# Altium PCB LM_001_Rev_F.PcbDoc (part 1 of 2)
Units mm, origin at the board's own origin, x right, y up, seen from the top; angles counter-clockwise.
Board outline 67 x 121.83 mm, 4 copper layers (Top Layer, +5V, Signal Layer 1, Bottom Layer), stack 0.778 mm thick; 108 components, 99 nets, 342 pads, 23 vias.
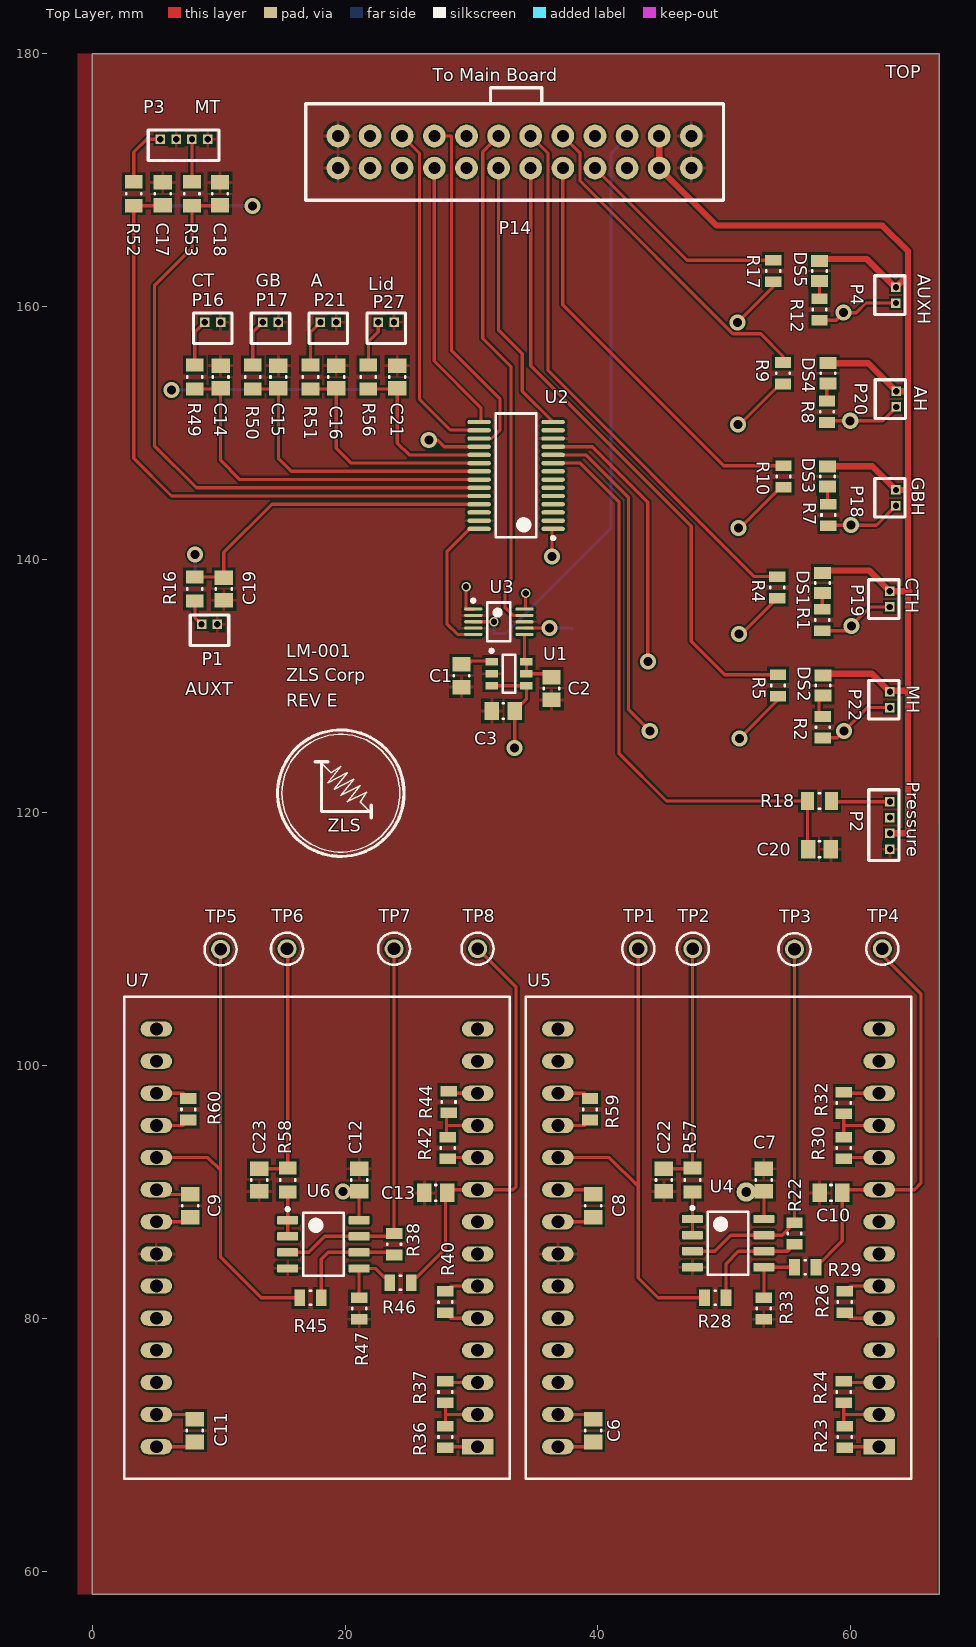
[diagram p0: Top Layer view]
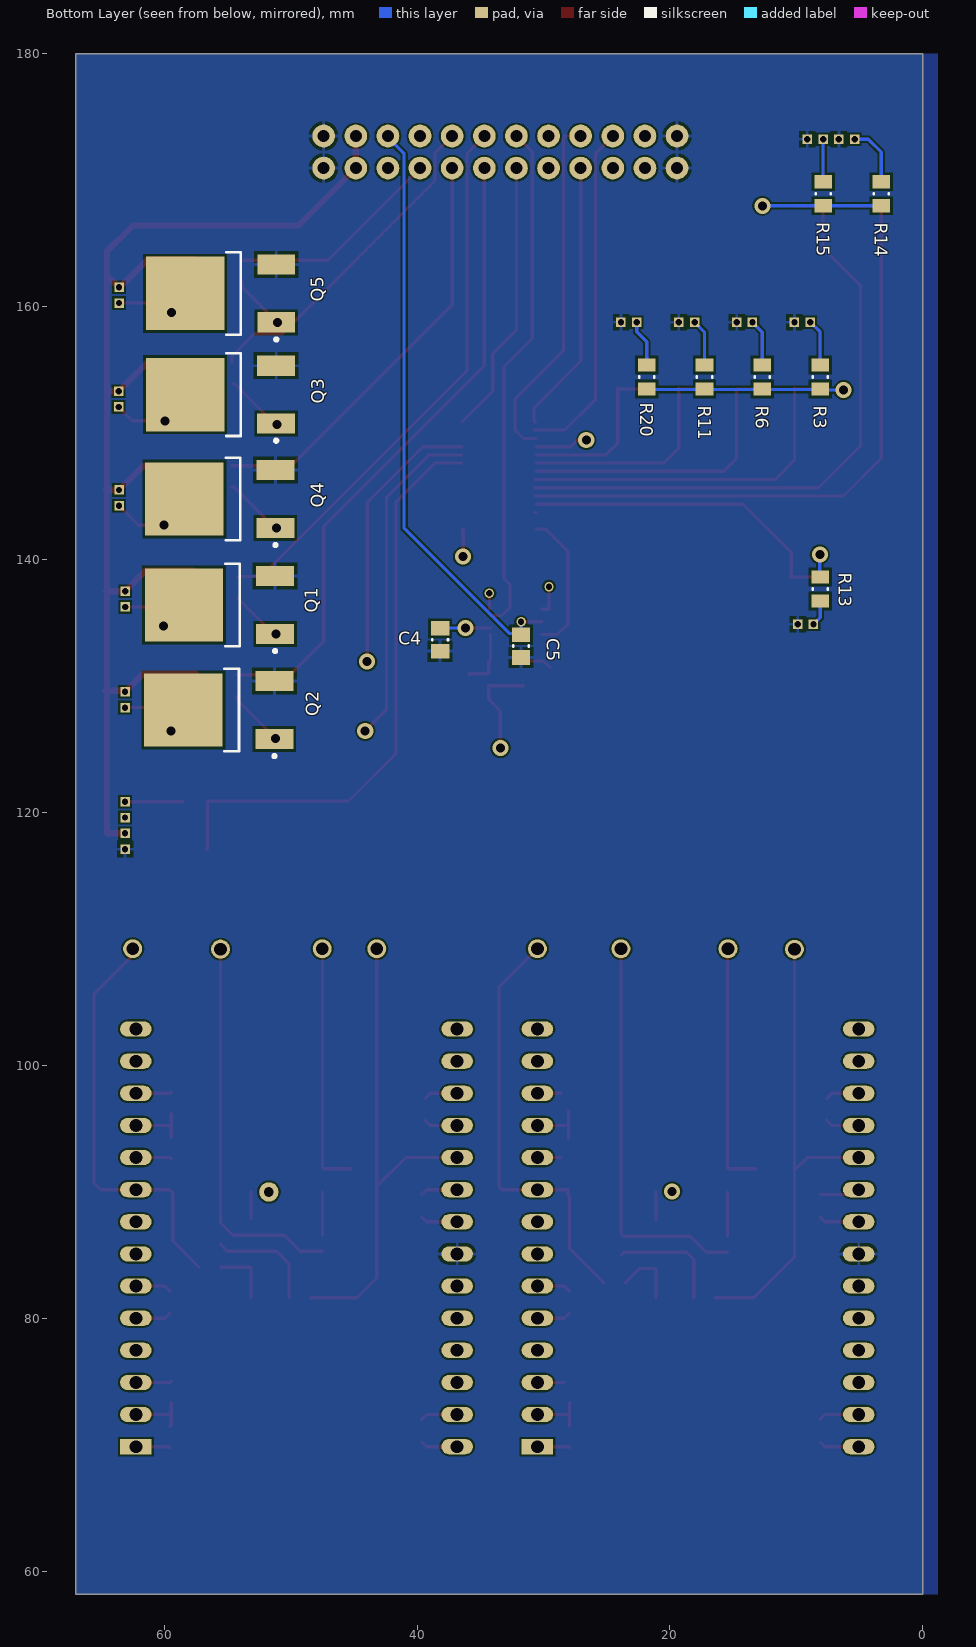
[diagram p1: Bottom Layer view, seen from below]
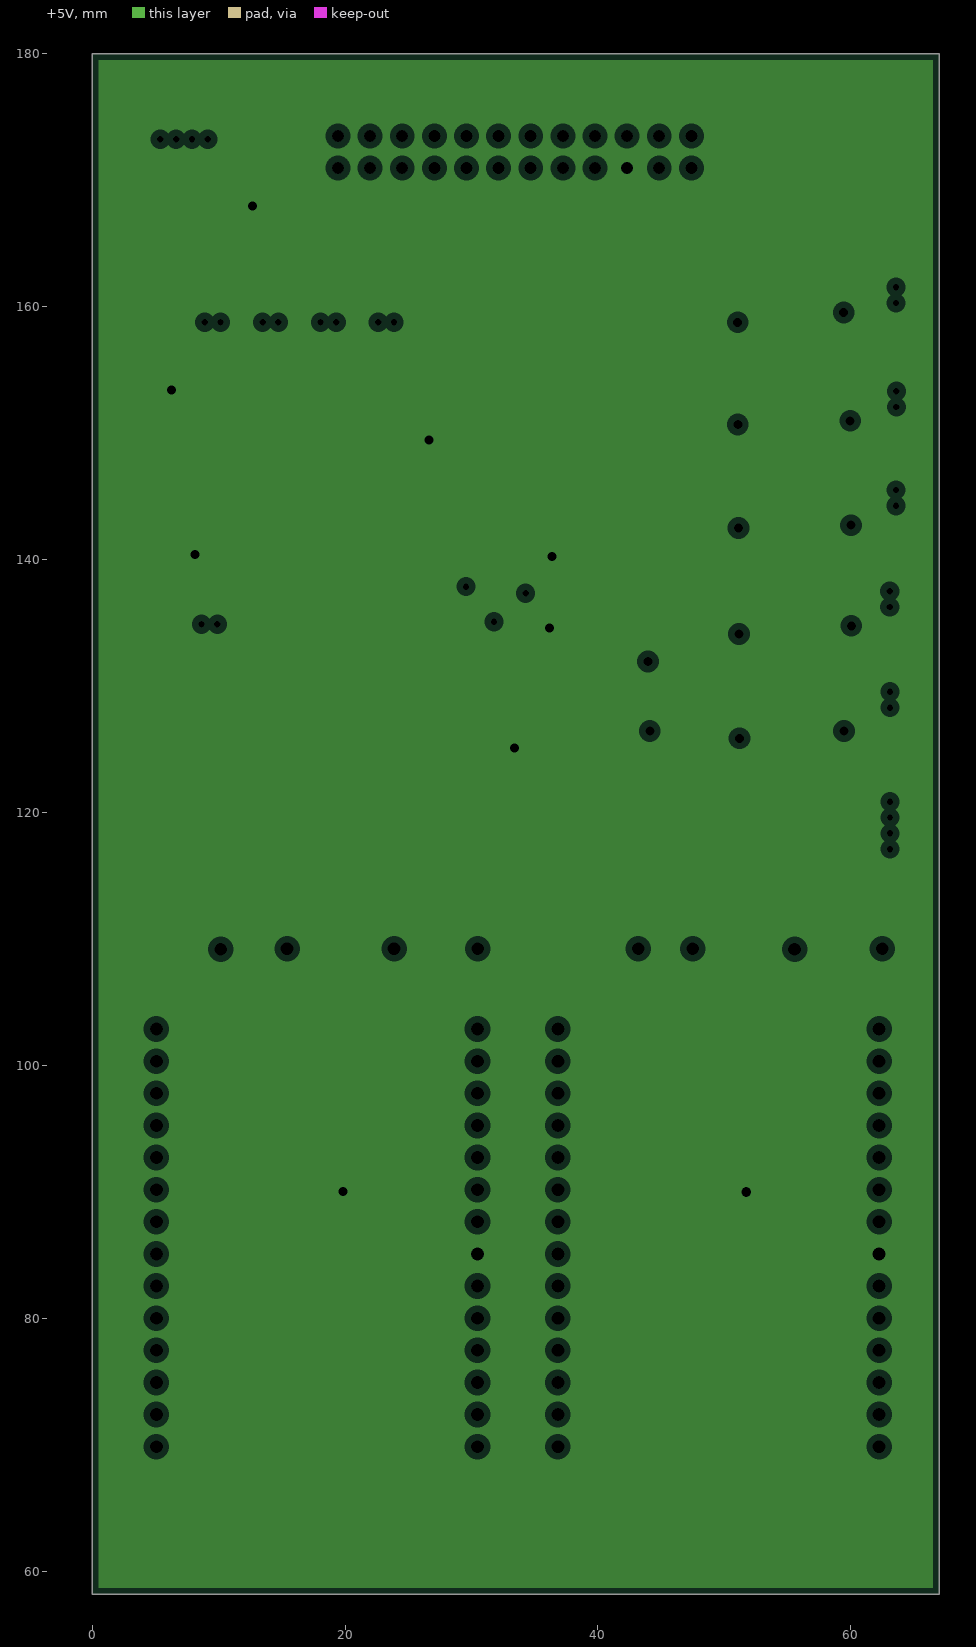
[diagram p2: +5V, clearances drawn from the general rule]
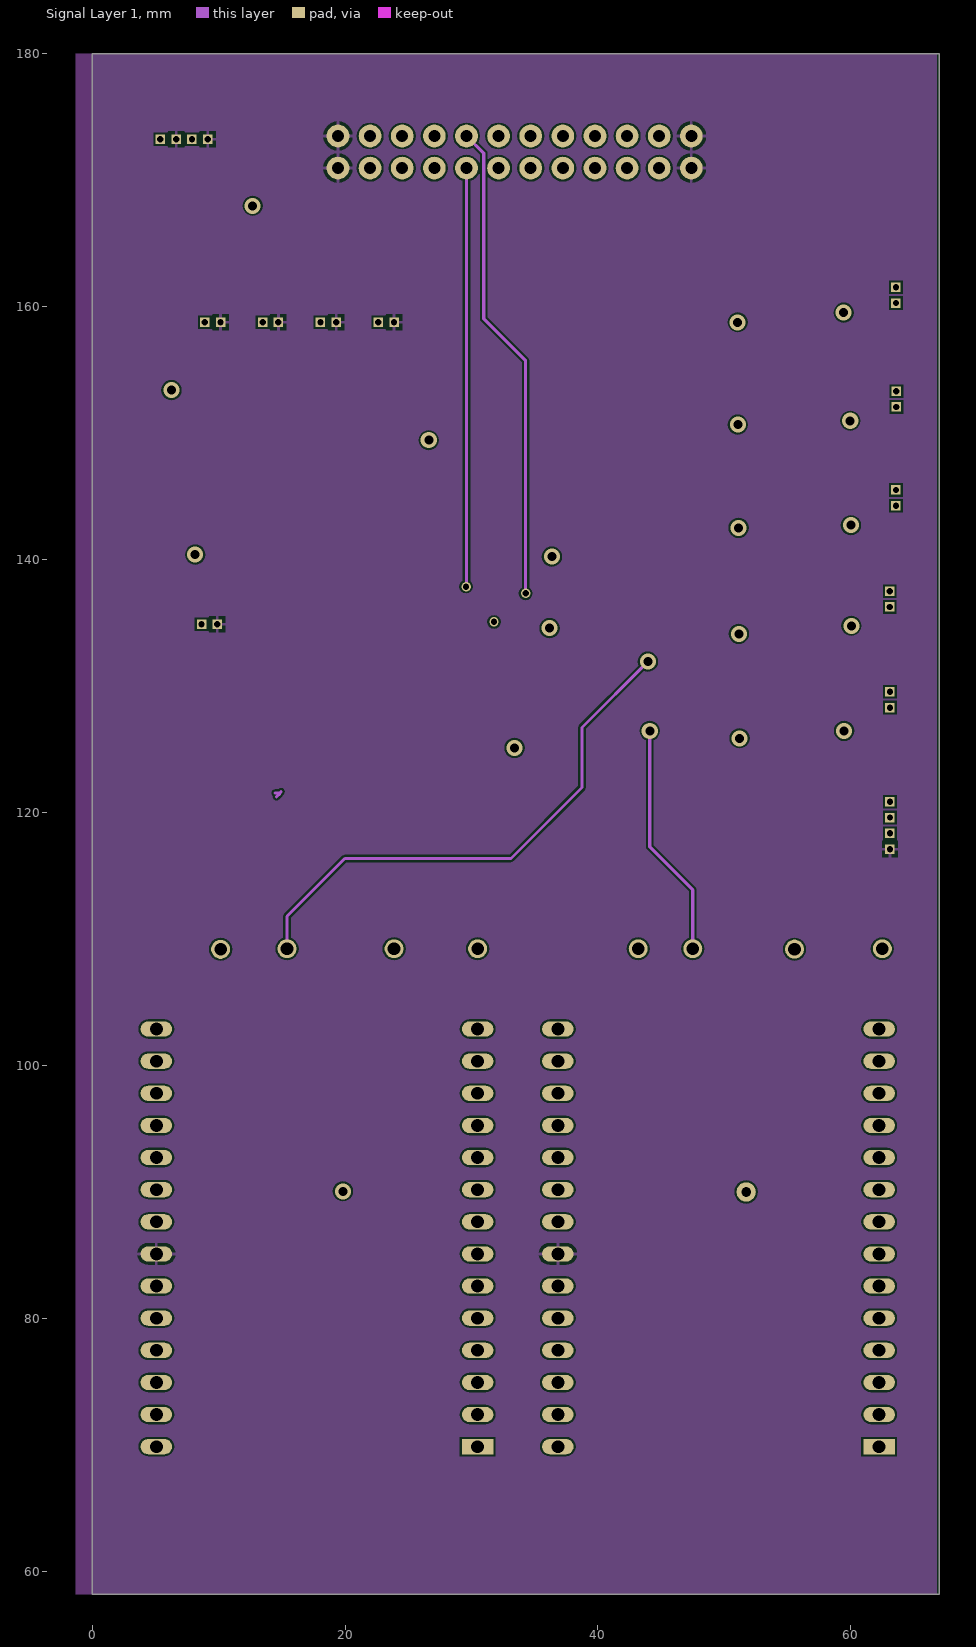
[diagram p3: Signal Layer 1]

## Layer stack, top to bottom
Top Solder: solder mask 0.0102, Solder Resist, Dk 3.5
Top Layer: signal copper 0.0356
Dielectric 1: core 0.254, FR-4, Dk 4.2
+5V: plane copper 0.036, net +5
Dielectric 4: prepreg 0.127, Dk 4.2
Signal Layer 1: signal copper 0.036
Dielectric 3: core 0.254, Dk 4.2
Bottom Layer: signal copper 0.0356
Bottom Solder: solder mask 0.0102, Solder Resist, Dk 3.5

## Board outline
0,180 67,180 67,58.166 0,58.166

## Design rules (kind name [scope] priority, off if disabled: settings)
Clearance [All] p1: gap=0.15 ignorepadtopadclearanceinfootprint=FALSE except(0.2: SMDPad-Fill SMDPad-Poly SMDPad-Region)
ComponentClearance [All] p1: gap=0 collisioncheckmode=3 verticalgap=0.254 showdistances=TRUE
MinimumSolderMaskSliver [All] p1: minsoldermaskwidth=0.045
PlaneClearance [All] p1: clearance=0.508
PlaneConnect [All] p1: planeconnectstyle=Relief reliefexpansion=0.508 reliefentries=4 reliefconductorwidth=0.254 reliefairgap=0.254
PolygonConnect [All] p1: connectstyle=Relief reliefconductorwidth=0.254 reliefentries=4 polygonreliefangle="90 Angle" airgapwidth=0.254
RoutingVias [All] p1: holewidth=0.711 width=1.27 viastyle="Through Hole" minholewidth=0.711 minwidth=1.27 maxholewidth=0.711 maxwidth=1.27
SilkToSilkClearance [All] p1: silktosilkclearance=0.127
SilkToSolderMaskClearance [IsPad] p1: minsilkscreentomaskgap=0.127 clearancetoexposedcopper=TRUE
SolderMaskExpansion [All] p1: expansion=0.2
Width [All] p1: maxlimit=0.762 minlimit=0.254 preferedwidth=0.254
24 further rules are at their usual default settings.

## Classes and differential pairs
component class LM_001: C1 C2 C3 C4 C5 C14 C15 C16 C17 C18 C19 C20 C21 DS1 DS2 DS3 DS4 DS5 P1 P2 P3 P4 P14 P16 P17 P18 P19 P20 P21 P22 P27 Q1 Q2 Q3 Q4 Q5 R1 R2 R3 R4 R5 R6 R7 R8 R9 R10 R11 R12 R13 R14 R15 R16 R17 R18 R20 R49 R50 R51 R52 R53 R56 U1 U2 U3
component class Signal_Conditioner: C6 C7 C8 C9 C10 C11 C12 C13 C22 C23 R22 R23 R24 R26 R28 R29 R30 R32 R33 R36 R37 R38 R40 R42 R44 R45 R46 R47 R57 R58 R59 R60 TP1 TP2 TP3 TP4 TP5 TP6 TP7 TP8 U4 U5 U6 U7

## Components (designator, comment, footprint, x,y, rotation, side; value= is the part's Value field where it differs from the comment)
C1 "CAP CER 0.1UF 25V X7R 0805" CAPC0805(2012)145_N 29.21,130.81 r90 top
C2 "CAP CER 0.1UF 25V X7R 0805" CAPC0805(2012)145_N 36.322,129.794 r270 top
C3 "CAP CER 0.1UF 25V X7R 0805" CAPC0805(2012)145_N 32.512,128.016 r180 top
C4 "CAP CER 0.1UF 25V X7R 0805" CAPC0805(2012)145_N 38.176,133.655 r270 bottom
C5 "CAP CER 0.1UF 25V X7R 0805" CAPC0805(2012)145_N 31.782,133.147 r270 bottom
C6 "22uF" CAPC0805(2012)145_N 39.624,71.12 r90 top
C7 "CAP CER 0.1UF 25V X7R 0805" CAPC0805(2012)145_N 53.117,90.932 r90 top
C8 "CAP CER 0.1UF 25V X7R 0805" CAPC0805(2012)145_N 39.624,88.9 r90 top
C9 "CAP CER 0.1UF 25V X7R 0805" CAPC0805(2012)145_N 7.758,88.9 r90 top
C10 "22uF" CAPC0805(2012)145_N 58.42,89.916 r180 top
C11 "22uF" CAPC0805(2012)145_N 8.128,71.12 r90 top
C12 "CAP CER 0.1UF 25V X7R 0805" CAPC0805(2012)145_N 21.113,90.932 r90 top
C13 "22uF" CAPC0805(2012)145_N 27.178,89.916 r180 top
C14 "10uF" CAPC0805(2012)145_N 10.16,154.432 r90 top
C15 "10uF" CAPC0805(2012)145_N 14.732,154.432 r90 top
C16 "10uF" CAPC0805(2012)145_N 19.304,154.432 r90 top
C17 "10uF" CAPC0805(2012)145_N 5.588,168.91 r90 top
C18 "10uF" CAPC0805(2012)145_N 10.11,168.91 r90 top
C19 "10uF" CAPC0805(2012)145_N 10.414,137.668 r270 top
C20 "10uF" CAPC0805(2012)145_N 57.52,117.094 r0 top
C21 "10uF" CAPC0805(2012)145_N 24.13,154.432 r90 top
C22 "10uF" CAPC0805(2012)145_N 45.212,90.932 r270 top
C23 "10uF" CAPC0805(2012)145_N 13.208,90.932 r270 top
DS1 "LTST-S220KRKT" 0805C_L 57.736,138.147 r270 top
DS2 "LTST-S220KRKT" 0805C_L 57.788,130.037 r270 top
DS3 "LTST-S220KRKT" 0805C_L 58.149,146.558 r270 top
DS4 "LTST-S220KRKT" 0805C_L 58.182,154.722 r270 top
DS5 "LTST-S220KRKT" 0805C_L 57.512,162.814 r270 top
P1 "0530470210" 0530470210 9.906,134.874 r180 top
P2 "0530470410" 0530470410 63.086,117.094 r90 top
P3 "0530470410" 0530470410 9.144,173.228 r180 top
P4 "0530470210" 0530470210 63.557,160.274 r90 top
P14 "IPL1-112-01-L-D-K" IPL1-112-01-F-S-K 33.412,172.212 r0 top locked
P16 "0530470210" 0530470210 10.16,158.75 r180 top
P17 "0530470210" 0530470210 14.732,158.75 r180 top
P18 "0530470210" 0530470210 63.557,144.247 r90 top
P19 "0530470210" 0530470210 63.071,136.242 r90 top
P20 "0530470210" 0530470210 63.593,152.055 r90 top
P21 "0530470210" 0530470210 19.304,158.75 r180 top
P22 "0530470210" 0530470210 63.086,128.284 r90 top
P27 "0530470210" 0530470210 23.876,158.75 r180 top
Q1 "NTD4804NT4G" ONSC-DPAK-3-369AA-01_V 55.624,136.398 r0 bottom
Q2 "NTD4804NT4G" ONSC-DPAK-3-369AA-01_V 55.676,128.093 r0 bottom
Q3 "NTD4804NT4G" ONSC-DPAK-3-369AA-01_V 55.538,153.032 r0 bottom
Q4 "NTD4804NT4G" ONSC-DPAK-3-369AA-01_V 55.595,144.78 r0 bottom
Q5 "NTD4804NT4G" ONSC-DPAK-3-369AA-01_V 55.53,161.036 r0 bottom
R1 "4.99K" RESC0805(2012)_L 57.736,135.216 r90 top
R2 "4.99K" RESC0805(2012)_L 57.788,126.735 r90 top
R3 "6.98K" RESC0805(2012)_N 8.128,154.432 r270 bottom
R4 "75" RESC0805(2012)_L 54.18,137.792 r270 top
R5 "75" RESC0805(2012)_L 54.232,130.037 r270 top
R6 "6.98K" RESC0805(2012)_N 12.7,154.432 r270 bottom
R7 "4.99K" RESC0805(2012)_L 58.223,143.51 r90 top
R8 "4.99K" RESC0805(2012)_L 58.109,151.674 r90 top
R9 "75" RESC0805(2012)_L 54.627,154.722 r270 top
R10 "75" RESC0805(2012)_L 54.667,146.558 r270 top
R11 "6.98K" RESC0805(2012)_N 17.272,154.432 r270 bottom
R12 "4.99K" RESC0805(2012)_L 57.512,159.766 r90 top
R13 "6.98K" RESC0805(2012)_N 8.122,137.668 r90 bottom
R14 "6.98K" RESC0805(2012)_N 3.302,168.91 r270 bottom
R15 "6.98K" RESC0805(2012)_N 7.874,168.91 r270 bottom
R16 "1.6K" RESC0805(2012)_N 8.128,137.668 r90 top
R17 "75" RESC0805(2012)_L 53.847,162.814 r270 top
R18 "1.6K" RESC0805(2012)_N 57.512,120.904 r180 top
R20 "6.98K" RESC0805(2012)_N 21.844,154.432 r270 bottom
R22 "25K" RESC0805(2012)_L 55.538,86.702 r90 top
R23 "1K" RESC0805(2012)_L 59.524,70.612 r270 top
R24 "10k" RESC0805(2012)_L 59.436,74.168 r90 top
R26 "50k" RESC0805(2012)_L 59.524,81.28 r270 top
R28 "10k" RESC0805(2012)_L 49.276,81.622 r0 top
R29 "1.21k" RESC0805(2012)_L 56.388,84.035 r0 top
R30 "250k" RESC0805(2012)_L 59.436,93.472 r270 top
R32 "DNP" RESC0805(2012)_L 59.436,97.028 r90 top
R33 "10k" RESC0805(2012)_L 53.117,80.772 r90 top
R36 "1K" RESC0805(2012)_L 27.94,70.612 r270 top
R37 "10k" RESC0805(2012)_L 27.94,74.168 r90 top
R38 "25K" RESC0805(2012)_L 23.876,85.852 r90 top
R40 "50k" RESC0805(2012)_L 27.94,81.28 r270 top
R42 "250k" RESC0805(2012)_L 28.115,93.472 r270 top
R44 "250k" RESC0805(2012)_L 28.183,97.104 r90 top
R45 "10k" RESC0805(2012)_L 17.272,81.622 r0 top
R46 "1.21k" RESC0805(2012)_L 24.384,82.804 r0 top
R47 "10k" RESC0805(2012)_L 21.113,80.772 r90 top
R49 "1.6K" RESC0805(2012)_N 8.122,154.432 r270 top
R50 "1.6K" RESC0805(2012)_N 12.7,154.432 r270 top
R51 "1.6K" RESC0805(2012)_N 17.272,154.432 r270 top
R52 "1.6K" RESC0805(2012)_N 3.302,168.91 r270 top
R53 "1.6K" RESC0805(2012)_N 7.894,168.91 r270 top
R56 "1.6K" RESC0805(2012)_N 21.844,154.432 r270 top
R57 "1.6K" RESC0805(2012)_N 47.467,90.932 r270 top
R58 "1.6K" RESC0805(2012)_N 15.463,90.932 r270 top
R59 "100k" RESC0805(2012)_L 39.37,96.52 r270 top
R60 "100k" RESC0805(2012)_L 7.62,96.52 r270 top
TP1 "DNP" KSTN-5003 43.18,109.22 r0 top
TP2 "DNP" KSTN-5003 47.498,109.22 r0 top
TP3 "DNP" KSTN-5003 55.538,109.189 r0 top
TP4 "DNP" KSTN-5003 62.484,109.22 r0 top
TP5 "DNP" KSTN-5003 10.16,109.17 r0 top
TP6 "DNP" KSTN-5003 15.413,109.22 r0 top
TP7 "DNP" KSTN-5003 23.876,109.22 r0 top
TP8 "DNP" KSTN-5003 30.48,109.22 r0 top
U1 "MAX6070AAUT41+T" SOT95P280X445-6N 32.962,130.97 r0 top
U2 "ADG1606BRUZ-REEL7" ADI-RU-28_M 33.528,146.641 r180 top
U3 "MAX11100EUB+T" U10+2_L 32.162,135.07 r0 top
U4 "LPC662AIM" D0008A_M 50.292,85.94 r0 top
U5 "SA40012" SA40012 62.23,69.85 r180 top locked
U6 "LPC662AIM" D0008A_M 18.288,85.852 r0 top
U7 "SA40012" SA40012 30.48,69.85 r180 top locked

## Footprints (in the part's own frame and the unit in brackets; to place one, negate y for a bottom-side part, rotate by r counter-clockwise, add the part's x,y. Pads: shape width x height; smd on the part's side, far side on the other; paste and mask are expansions set on the pad)
0805C_L [mm]
  rect 0.95x1.35 smd: 1(-0.8,0) 2(0.8,0)
  silkscreen extent -0.05,-0.58 0.05,0.58, body extent -1.1,-0.72 1.1,0.72, height 0.75
0530470210 [mm] "CONN HEADER VERT 2POS 1.25MM"
  rect 0.75x0.75 hole 0.5: 1(0,0) 2(1.25,0)
  silkscreen extent -0.9,-0.73 2.15,1.68
0530470410 [mm] "CONN HEADER VERT 4POS 1.25MM"
  rect 0.75x0.75 hole 0.5: 1(0,0) 2(1.25,0) 3(2.5,0) 4(3.75,0)
  silkscreen extent -0.9,-0.73 4.7,1.68
ADI-RU-28_M [mm] "SOP, 28-Leads, Body 9.7x4.4mm, Pitch 0.65mm, IPC Low Density"
  oval 1.85x0.35 smd: 1(-2.925,4.225) 2(-2.925,3.575) 3(-2.925,2.925) 4(-2.925,2.275) 5(-2.925,1.625) 6(-2.925,0.975) 7(-2.925,0.325) 8(-2.925,-0.325) 9(-2.925,-0.975) 10(-2.925,-1.625) 11(-2.925,-2.275) 12(-2.925,-2.925) 13(-2.925,-3.575) 14(-2.925,-4.225) 15(2.925,-4.225) 16(2.925,-3.575) 17(2.925,-2.925) 18(2.925,-2.275) 19(2.925,-1.625) 20(2.925,-0.975) 21(2.925,-0.325) 22(2.925,0.325) 23(2.925,0.975) 24(2.925,1.625) 25(2.925,2.275) 26(2.925,2.925) 27(2.925,3.575) 28(2.925,4.225)
  silkscreen extent -3.05,-4.9 1.6,5.07, body extent -2.25,-4.9 2.25,4.9, height 1.2
CAPC0805(2012)145_N [mm] "Chip Capacitor, Body 2.0x1.2mm, Height 1.45mm, IPC Medium Density"
  rect 1.15x1.45 smd: 1(-0.9,0) 2(0.9,0)
  silkscreen extent -0.05,-0.62 0.05,0.62, body extent -1.1,-0.72 1.1,0.73, height 1.45
D0008A_M [mm] "SOIC, 8-Leads, Body 5x4mm, Pitch 1.27mm, IPC Low Density"
  rrect15% 1.65x0.65 smd: 1(-2.825,1.905) 2(-2.825,0.635) 3(-2.825,-0.635) 4(-2.825,-1.905) 5(2.825,-1.905) 6(2.825,-0.635) 7(2.825,0.635) 8(2.825,1.905)
  silkscreen extent -2.95,-2.5 1.6,2.9, body extent -3,-2.45 3,2.45, height 1.63
IPL1-112-01-F-S-K [mm]
  round 1.8 hole 0.95: 1(-13.97,-1.27) 2(-13.97,1.27) 3(-11.43,-1.27) 4(-11.43,1.27) 5(-8.89,-1.27) 6(-8.89,1.27) 7(-6.35,-1.27) 8(-6.35,1.27) 9(-3.81,-1.27) 10(-3.81,1.27) 11(-1.27,-1.27) 12(-1.27,1.27) 13(1.27,-1.27) 14(1.27,1.27) 15(3.81,-1.27) 16(3.81,1.27) 17(6.35,-1.27) 18(6.35,1.27) 19(8.89,-1.27) 20(8.89,1.27) 21(11.43,-1.27) 22(11.43,1.27) 23(13.97,-1.27) 24(13.97,1.27)
  silkscreen extent -16.51,-3.81 16.51,3.81, body extent -15.95,-4.32 16.05,3.56, height 8.13
KSTN-5003 [mm] "Test Point, Through Hole, Dia 2.54mm"
  round 1.5 hole 1: 1(0,0)
  silkscreen extent -1.27,-1.27 1.27,1.27, body extent -1.27,-1.27 1.27,1.27, height 4.57
ONSC-DPAK-3-369AA-01_V [mm] "DPAK, 3-Leads, Body 6.54x6.095mm, Pitch 2.29mm"
  rect 3x1.6 smd: 1(-4.4,2.29) 3(-4.4,-2.29)
  rect 6.2x5.8 smd: 4(2.8,0)
  silkscreen extent -4.52,-3.27 -0.45,3.76, body extent -1.6,-3.27 4.49,3.27, height 2.47
RESC0805(2012)_L [mm] "Chip Resistor, Body 2.0x1.3mm, IPC High Density"
  rect 0.85x1.3 smd: 1(-0.85,0) 2(0.85,0)
  silkscreen extent -0.05,-0.55 0.05,0.55, body extent -1.1,-0.67 1.1,0.68, height 0.7
RESC0805(2012)_N [mm] "Chip Resistor, Body 2.0x1.3mm, IPC Medium Density"
  rect 1.05x1.4 smd: 1(-0.95,0) 2(0.95,0)
  silkscreen extent -0.05,-0.6 0.05,0.6, body extent -1.1,-0.67 1.1,0.68, height 0.7
SA40012 [mm]
  rect 2.5x1.2 hole 1.016: 1(0,0)
  oval 2.5x1.2 hole 1.016: 2(0,-2.54) 3(0,-5.08) 4(0,-7.62) 5(0,-10.16) 6(0,-12.7) 7(0,-15.24) 8(0,-17.78) 9(0,-20.32) 10(0,-22.86) 11(0,-25.4) 12(0,-27.94) 13(0,-30.48) 14(0,-33.02) 15(25.4,-33.02) 16(25.4,-30.48) 17(25.4,-27.94) 18(25.4,-25.4) 19(25.4,-22.86) 20(25.4,-20.32) 21(25.4,-17.78) 22(25.4,-15.24) 23(25.4,-12.7) 24(25.4,-10.16) 25(25.4,-7.62) 26(25.4,-5.08) 27(25.4,-2.54) 28(25.4,0)
  silkscreen extent -2.54,-35.56 27.94,2.54
SOT95P280X445-6N [mm] "SOT23, 6-Leads, Body 2.90x2.80mm, Pitch 0.95mm, IPC Medium Density"
  rect 1x0.6 smd: 1(-1.375,0.95) 2(-1.375,0) 3(-1.375,-0.95) 4(1.375,-0.95) 5(1.375,0) 6(1.375,0.95)
  silkscreen extent -1.5,-1.5 0.5,1.92, body extent -2.11,-1.78 2.11,1.73, height 1.08
U10+2_L [mm] "TSSOP, 10-Leads, Body 3x3mm, Pitch 0.5mm, IPC High Density"
  oval 1.45x0.25 smd: 1(-2.025,1) 2(-2.025,0.5) 3(-2.025,0) 4(-2.025,-0.5) 5(-2.025,-1) 6(2.025,-1) 7(2.025,-0.5) 8(2.025,0) 9(2.025,0.5) 10(2.025,1)
  silkscreen extent -2.15,-1.53 0.9,1.8, body extent -1.55,-1.55 1.55,1.55, height 1.1

## Part data
C1 C2 C3 C4 C5 C7 C8 C9 C12: library part CMP-1036-04795-1, Capacitance=0.1µF, Manufacturer="Murata Electronics North America", Manufacturer Part Number=GRM21BR71E104KA01L, Operating Temperature="-55°C ~ 125°C", Package / Case="0805 (2012 Metric)", Ratings=-, Supplier Part Number 1=490-1673-6-ND, Temperature Coefficient=X7R, Tolerance=±10%, Voltage - Rated=25V, Applications="General Purpose", Category=Capacitors, ComponentLink1Description=http://www.murata.com/~/media/webrenewal/support/library/catalog/products/capacitor/mlcc/c02e.ashx, ComponentLink1URL=http://www.murata.com/~/media/webrenewal/support/library/catalog/products/capacitor/mlcc/c02e.ashx, Features=-, Height - Seated (Max)=-, Lead Spacing=-, Lead Style=-, Mounting Type="Surface Mount, MLCC", Packaging=Digi-Reel®, Part Status=Active, Pricing 1="1=0.2, 10=0.145, 100=0.0683, 500=0.04788, 1000=0.03964 (USD)", RoHS="RoHS Compliant", Size / Dimension="0.079\" L x 0.049\" W (2.00mm x 1.25mm)", Stock 1=891652, Supplier 1=Digi-Key, Thickness (Max)="0.053\" (1.35mm)"
C6 C10 C11 C13: library part CMP-1036-04795-1, "CAP CER 22UF 16V X5R 0805", Manufacturer="Murata Electronics North America", Manufacturer Part Number=GRM219R61C226ME15L, Operating Temperature="-55°C ~ 85°C", Package / Case="0805 (2012 Metric)", Ratings=-, Supplier Part Number 1=490-9952-1-ND, Temperature Coefficient=X5R, Tolerance=±20%, Voltage - Rated=16V, Applications="General Purpose", Category=Capacitors, ComponentLink1Description=http://search.murata.co.jp/Ceramy/image/img/A01X/G101/ENG/GRM219R61C226ME15-01.pdf, ComponentLink1URL=http://search.murata.co.jp/Ceramy/image/img/A01X/G101/ENG/GRM219R61C226ME15-01.pdf, Features=-, Height - Seated (Max)=-, Lead Spacing=-, Lead Style=-, Mounting Type="Surface Mount, MLCC", Notification="Current market demand for these product types have resulted in fluctuating and extending lead times. Lead times may differ.", Packaging="Cut Tape (CT)", Part Status=Active, Pricing 1="1=0.51, 10=0.359, 100=0.2364, 500=0.1751, 1000=0.14884 (USD)", RoHS="RoHS Compliant", Size / Dimension="0.079\" L x 0.049\" W (2.00mm x 1.25mm)", Stock 1=200, Supplier 1=Digi-Key, Thickness (Max)="0.039\" (1.00mm)"
C14 C15 C16 C17 C18 C19 C20 C21 C22 C23: library part CMP-1036-04795-1, "CAP CER 10UF 16V X6S 0805", Manufacturer="TDK Corporation", Manufacturer Part Number=C2012X6S1C106K085AC, Operating Temperature="-55°C ~ 105°C", Package / Case="0805 (2012 Metric)", Ratings=-, Supplier Part Number 1=445-14483-6-ND, Temperature Coefficient=X6S, Tolerance=±10%, Voltage - Rated=16V, Applications="General Purpose", Category=Capacitors, ComponentLink1Description=https://product.tdk.com/info/en/catalog/datasheets/mlcc_commercial_general_en.pdf, ComponentLink1URL=https://product.tdk.com/info/en/catalog/datasheets/mlcc_commercial_general_en.pdf, Failure Rate=-, Features="Low ESL", Height - Seated (Max)=-, Lead Spacing=-, Lead Style=-, Mounting Type="Surface Mount, MLCC", Notification="Current market demand for these product types have resulted in fluctuating and extending lead times. Lead times may differ.", Packaging=Digi-Reel®, Part Status=Active, Pricing 1="1=0.38, 10=0.259, 100=0.1466, 500=0.1035, 1000=0.09056 (USD)", RoHS="RoHS Compliant", Size / Dimension="0.079\" L x 0.049\" W (2.00mm x 1.25mm)", Stock 1=0, Supplier 1=Digi-Key, Thickness (Max)="0.039\" (1.00mm)"
DS1 DS2 DS3 DS4 DS5: library part "LED A/K", "LED RED CLEAR CHIP SMD R/A", Case/Package=0805, Case Code (Metric)=2012, Colour=Red, Forward Current=20mA, Forward Voltage=2V, Lens Colour=Colorless, Manufacturer="Vishay / Lite-On", Max Operating Temperature=85°C, Min Operating Temperature=-55°C, Package Quantity=4000, Power Dissipation=75mW, Supplier Part Number 1=160-1469-1-ND, Case Code (Imperial)=0805, ComponentLink1Description=https://datasheet.ciiva.com/2110/s-110-ltst-s220krkt-2110132.pdf, ComponentLink1URL=https://datasheet.ciiva.com/2110/s-110-ltst-s220krkt-2110132.pdf, ComponentLink2Description=https://datasheet.ciiva.com/2110/s-110-ltst-s220krkt-2110133.pdf, ComponentLink2URL=https://datasheet.ciiva.com/2110/s-110-ltst-s220krkt-2110133.pdf, ComponentLink3Description=https://datasheet.ciiva.com/2110/s-110-ltst-s220krkt-2110134.pdf, ComponentLink3URL=https://datasheet.ciiva.com/2110/s-110-ltst-s220krkt-2110134.pdf, ComponentLink4Description=https://datasheet.ciiva.com/12403/lite-on-ltst-s220krkt-187389-12403798.pdf, ComponentLink4URL=https://datasheet.ciiva.com/12403/lite-on-ltst-s220krkt-187389-12403798.pdf, ComponentLink5Description=https://datasheet.ciiva.com/16345/lite-onltst-s220krkt-16345511.pdf, ComponentLink5URL=https://datasheet.ciiva.com/16345/lite-onltst-s220krkt-16345511.pdf, ComponentLink6Description=https://datasheet.ciiva.com/15118/getdatasheetpartid-225752-15118120.pdf, ComponentLink6URL=https://datasheet.ciiva.com/15118/getdatasheetpartid-225752-15118120.pdf, ComponentLink7Description=https://datasheet.ciiva.com/14633/0900766b80dc0b76-14633737.pdf, ComponentLink7URL=https://datasheet.ciiva.com/14633/0900766b80dc0b76-14633737.pdf, ComponentLink8Description=https://datasheet.ciiva.com/11775/0900766b80dc0b76-11775439.pdf, ComponentLink8URL=https://datasheet.ciiva.com/11775/0900766b80dc0b76-11775439.pdf, Depth=0.6mm, Dominant Wavelength=631nm, Height=0.6mm, Illumination Colour=Red, Lead Free="Lead Free", Length=2.1mm, Lens Style=Diffused,Colorless, Lens Transparency=Clear, Luminous Intensity=54mcd, Manufacturer Part Number=LTST-S220KRKT, Mount="Surface Mount", Number of Elements=1, Number of LEDs=1, Number of Pins=2, Packaging="Tape and Reel", Power Rating=75mW, Pricing 1="1=0.31, 10=0.225, 25=0.1656, 100=0.1183, 250=0.0804, 500=0.071, 1000=0.0556 (USD)", Radiation Hardening=No, Stock 1=108191, Supplier 1=Digi-Key, Test Current=20mA, Viewing Angle=130°, Wavelength=639nm, Width=1mm
P1 P4 P16 P17 P18 P19 P20 P21 P22 P27: "CONN HEADER VERT 2POS 1.25MM", Color=Natural, Contact Resistance=20mR, Housing Color=Beige, Manufacturer=Molex, Max Operating Temperature=85°C, Min Operating Temperature=-40°C, Supplier Part Number 1=WM1731-ND, ComponentLink1Description=http://components.arrow.com/part/dataview/2938464S3509005N3303?src-supplier=Arrow, ComponentLink1URL=http://components.arrow.com/part/dataview/2938464S3509005N3303?src-supplier=Arrow, ComponentLink2Description=https://www.molex.com/pdm_docs/sd/530470210_sd.pdf?src-supplier=Digi-Key, ComponentLink2URL=https://www.molex.com/pdm_docs/sd/530470210_sd.pdf?src-supplier=Digi-Key, Connector Type="Blade Pin", Contact Material=Bronze, Contact Mating Length=0.089inch, Contact Plating=Tin, Depth=3.2mm, Housing Material=Nylon, Length=4.25mm, Manufacturer Part Number=0530470210, Mount="Through Hole", Number of Contacts=2, Number of Positions=2, Number of Rows=1, Orientation=Straight, Packaging=Tray, Pitch=1.25mm, Pricing 1="1=0.19, 10=0.177, 100=0.1227, 500=0.10384, 1000=0.08496, 5000=0.07552, 10000=0.06844 (USD)", Stock 1=100609, Supplier 1=Digi-Key, Termination=Solder
P2 P3: "CONN HEADER VERT 4POS 1.25MM", Color=Natural, Contact Resistance=20mR, Housing Color=White, Manufacturer=Molex, Max Operating Temperature=85°C, Max Voltage Rating (AC)=125V, Min Operating Temperature=-40°C, Supplier Part Number 1=WM1733-ND, ComponentLink1Description=http://components.arrow.com/part/dataview/2938462S4237926N3303?src-supplier=Arrow, ComponentLink1URL=http://components.arrow.com/part/dataview/2938462S4237926N3303?src-supplier=Arrow, Connector Type="Blade Pin", Contact Material=Bronze, Contact Mating Length=0.089inch, Contact Plating=Tin, Depth=3.2mm, Housing Material=Nylon, Length=6.75mm, Manufacturer Part Number=0530470410, Mount="Through Hole", Number of Contacts=4, Number of Positions=4, Number of Rows=1, Orientation=Straight, Packaging=Tray, Pitch=1.25mm, Pricing 1="1=0.28, 10=0.261, 100=0.183, 500=0.15688, 1000=0.13073, 5000=0.11205, 10000=0.10458 (USD)", Stock 1=21727, Supplier 1=Digi-Key, Termination=Solder
P14: library part IPL1-112-01-F-S-K, Current Rating=-, Insulation Color=Natural, Manufacturer="Samtec Inc.", Material Flammability Rating="UL94 V-0", Operating Temperature="-55°C ~ 125°C", Supplier Part Number 1=SAM10587-ND, Voltage Rating="675VAC, 954VDC", Applications=-, Category="Connectors, Interconnects", ComponentLink1Description=http://suddendocs.samtec.com/prints/ipl1-1xx-xx-xxx-d-xx-x-xx-mkt.pdf, ComponentLink1URL=http://suddendocs.samtec.com/prints/ipl1-1xx-xx-xxx-d-xx-x-xx-mkt.pdf, Connector Type=Header, Contact Finish - Mating=Gold, Contact Finish - Post=Tin, Contact Finish Thickness - Mating="10.0µin (0.25µm)", Contact Finish Thickness - Post=-, Contact Length - Mating="0.215\" (5.46mm)", Contact Length - Post="0.120\" (3.05mm)", Contact Material="Phosphor Bronze", Contact Shape=Square, Contact Type="Male Pin", Fastening Type="Locking Ramp", Features=-, Ingress Protection=-, Insulation Height="0.320\" (8.13mm)", Insulation Material="Liquid Crystal Polymer (LCP)", Manufacturer Part Number=IPL1-112-01-L-D-K, Mated Stacking Heights=-, Mounting Type="Through Hole", Number of Positions=24, Number of Positions Loaded=All, Number of Rows=2, Overall Contact Length=-, Packaging=Tube, Part Status=Active, Pitch - Mating="0.100\" (2.54mm)", Pricing 1="1=3.8, 18=3.64778, 108=3.04, 504=2.58401, 1008=2.204, 5004=1.976 (USD)", RoHS="RoHS Compliant", Row Spacing - Mating="0.100\" (2.54mm)", Shrouding="Shrouded - 4 Wall", Stock 1=142, Style="Board to Cable/Wire", Supplier 1=Digi-Key, Termination=Solder
Q1 Q2 Q3 Q4 Q5: library part CMP-1058-00341-1, "Power MOSFET, 30 V, 117 A, Single N-Channel, 3-Pin DPAK, Pb-Free, Tape and Reel", Manufacturer="On Semiconductor", Package Type=DPAK-3, Supplier Part Number 1=NTD4804NT4GOSDKR-ND, Channel Polarity="N Channel", Ciss Typ (pF)=4490, ComponentLink1Description="Manufacturer URL", ComponentLink1URL=http://www.onsemi.com/, ComponentLink2Description=Datasheet, ComponentLink2URL=http://www.onsemi.cn/pub_link/Collateral/NTD4804N-D.PDF, ComponentLink3Description="Package Specification", ComponentLink3URL=http://www.onsemi.cn/pub_link/Collateral/369AA.PDF, Configuration=Single, Coss Typ (pF)=952, Crss Typ (pF)=556, DatasheetVersion="Rev. 8", ID Max (A)=117, Mounting Technology="Surface Mount", PackageDescription="3-Pin Flange Mount, Body 6.54 x 6.095 mm, Pitch 2.29 mm", PackageReference=DPAK-3-369AA-01, PackageVersion="Rev. B, 06/2010", Packing="Tape and Reel", PartNumber=NTD4804NT4G, Qrr Typ (nC)=30, RoHS=Pb-Free, Supplier 1=Digi-Key, V(BR)DSS Min (V)=30, VGS(th) Max (V)=2.5, VGS Max (V)=20
R1 R2 R7 R8 R12: library part CMP-1013-00393-1, "RES SMD 4.99K OHM 1% 1/8W 0805", Manufacturer="Vishay Dale", Manufacturer Part Number=CRCW08054K99FKEA, Operating Temperature="-55°C ~ 155°C", Package / Case="0805 (2012 Metric)", Power (Watts)="0.125W, 1/8W", Resistance (Ohms)=4.99k, Supplier Device Package=0805, Supplier Part Number 1=541-4.99KCCT-ND, Temperature Coefficient=±100ppm/°C, Tolerance=±1%, Category=Resistors, ComponentLink1Description=http://www.vishay.com/docs/20035/dcrcwe3.pdf, ComponentLink1URL=http://www.vishay.com/docs/20035/dcrcwe3.pdf, Composition="Thick Film", Failure Rate=-, Features="Automotive AEC-Q200", Height - Seated (Max)="0.020\" (0.50mm)", Packaging="Cut Tape (CT)", Part Status=Active, Pricing 1="1=0.1, 10=0.044, 100=0.0178, 1000=0.00802, 2500=0.00696 (USD)", RoHS="RoHS Compliant", Size / Dimension="0.079\" L x 0.049\" W (2.00mm x 1.25mm)", Stock 1=93740, Supplier 1=Digi-Key
R3 R6 R11 R13 R14 R15 R20: library part CMP-1013-00606-1, "RES SMD 6.98K OHM 1% 1/8W 0805", Manufacturer="Vishay Dale", Manufacturer Part Number=CRCW08056K98FKEA, Operating Temperature="-55°C ~ 155°C", Package / Case="0805 (2012 Metric)", Power (Watts)="0.125W, 1/8W", Supplier Device Package=0805, Supplier Part Number 1=541-6.98KCCT-ND, Temperature Coefficient=±100ppm/°C, Tolerance=±1%, Category=Resistors, ComponentLink1Description=http://www.vishay.com/docs/20035/dcrcwe3.pdf, ComponentLink1URL=http://www.vishay.com/docs/20035/dcrcwe3.pdf, Composition="Thick Film", Failure Rate=-, Features="Automotive AEC-Q200", Height - Seated (Max)="0.020\" (0.50mm)", Packaging="Cut Tape (CT)", Part Status=Active, Pricing 1="1=0.1, 10=0.055, 100=0.0223, 1000=0.01003, 2500=0.0087 (USD)", RoHS="RoHS Compliant", Size / Dimension="0.079\" L x 0.049\" W (2.00mm x 1.25mm)", Stock 1=573, Supplier 1=Digi-Key
R4 R5 R9 R10 R17: library part CMP-1013-00393-1, "RES SMD 75 OHM 1% 1/8W 0805", Manufacturer="Vishay Dale", Manufacturer Part Number=CRCW080575R0FKTA, Operating Temperature="-55°C ~ 155°C", Package / Case="0805 (2012 Metric)", Power (Watts)="0.125W, 1/8W", Supplier Device Package=0805, Supplier Part Number 1=541-3031-1-ND, Temperature Coefficient=±100ppm/°C, Tolerance=±1%, Category=Resistors, ComponentLink1Description=http://www.vishay.com/docs/20008/dcrcw.pdf, ComponentLink1URL=http://www.vishay.com/docs/20008/dcrcw.pdf, Composition="Thick Film", Failure Rate=-, Features="Automotive AEC-Q200", Height - Seated (Max)="0.020\" (0.50mm)", Packaging="Cut Tape (CT)", Part Status=Active, Pricing 1="1=0.16, 10=0.142, 100=0.0546, 1000=0.02401, 2500=0.02073 (USD)", RoHS="RoHS non-compliant", Size / Dimension="0.079\" L x 0.049\" W (2.00mm x 1.25mm)", Stock 1=1088, Supplier 1=Digi-Key
R16 R18 R49 R50 R51 R52 R53 R56 R57 R58: library part CMP-1013-00606-1, "RES SMD 1.6K OHM 1% 1/8W 0805"
R22 R38: library part CMP-1013-00393-1, "CRCW080510K0FKEA"
R23 R36: library part CMP-1013-00393-1, "RES SMD 1K OHM 1% 1/8W 0805", Manufacturer="Vishay Dale", Manufacturer Part Number=CRCW08051K00FKEA, Operating Temperature="-55°C ~ 155°C", Package / Case="0805 (2012 Metric)", Power (Watts)="0.125W, 1/8W", Supplier Device Package=0805, Supplier Part Number 1=541-1.00KCCT-ND, Temperature Coefficient=±100ppm/°C, Tolerance=±1%, Category=Resistors, ComponentLink1Description=http://www.vishay.com/docs/20035/dcrcwe3.pdf, ComponentLink1URL=http://www.vishay.com/docs/20035/dcrcwe3.pdf, Composition="Thick Film", Failure Rate=-, Features="Automotive AEC-Q200", Height - Seated (Max)="0.020\" (0.50mm)", Packaging="Cut Tape (CT)", Part Status=Active, Pricing 1="1=0.1, 10=0.055, 100=0.0223, 1000=0.01003, 2500=0.0087 (USD)", RoHS="RoHS Compliant", Size / Dimension="0.079\" L x 0.049\" W (2.00mm x 1.25mm)", Stock 1=157631, Supplier 1=Digi-Key
R24 R28 R33 R37 R45 R47: library part CMP-1013-00393-1, "RES SMD 10K OHM 1% 1/8W 0805", Manufacturer="Vishay Dale", Manufacturer Part Number=CRCW080510K0FKEA, Operating Temperature="-55°C ~ 155°C", Package / Case="0805 (2012 Metric)", Power (Watts)="0.125W, 1/8W", Supplier Device Package=0805, Supplier Part Number 1=541-10.0KCCT-ND, Temperature Coefficient=±100ppm/°C, Tolerance=±1%, Category=Resistors, ComponentLink1Description=http://www.vishay.com/docs/20035/dcrcwe3.pdf, ComponentLink1URL=http://www.vishay.com/docs/20035/dcrcwe3.pdf, Composition="Thick Film", Failure Rate=-, Features="Automotive AEC-Q200", Height - Seated (Max)="0.020\" (0.50mm)", Packaging="Cut Tape (CT)", Part Status=Active, Pricing 1="1=0.1, 10=0.055, 100=0.0223, 1000=0.01003, 2500=0.0087 (USD)", RoHS="RoHS Compliant", Size / Dimension="0.079\" L x 0.049\" W (2.00mm x 1.25mm)", Stock 1=1858038, Supplier 1=Digi-Key
R26 R40: library part CMP-1013-00393-1, "RES SMD 24.3K OHM 1% 1/8W 0805", Manufacturer="Vishay Dale", Manufacturer Part Number=CRCW080524K3FKEA, Operating Temperature="-55°C ~ 155°C", Package / Case="0805 (2012 Metric)", Power (Watts)="0.125W, 1/8W", Supplier Device Package=0805, Supplier Part Number 1=541-24.3KCCT-ND, Temperature Coefficient=±100ppm/°C, Tolerance=±1%, Category=Resistors, ComponentLink1Description=http://www.vishay.com/docs/20035/dcrcwe3.pdf, ComponentLink1URL=http://www.vishay.com/docs/20035/dcrcwe3.pdf, Composition="Thick Film", Failure Rate=-, Features="Automotive AEC-Q200", Height - Seated (Max)="0.020\" (0.50mm)", Packaging="Cut Tape (CT)", Part Status=Active, Pricing 1="1=0.1, 10=0.055, 100=0.0223, 1000=0.01003, 2500=0.0087 (USD)", RoHS="RoHS Compliant", Size / Dimension="0.079\" L x 0.049\" W (2.00mm x 1.25mm)", Stock 1=35, Supplier 1=Digi-Key
R29 R46: library part CMP-1013-00393-1, "RES SMD 1.21K OHM 1% 1/8W 0805", Manufacturer="Vishay Dale", Manufacturer Part Number=CRCW08051K21FKEA, Operating Temperature="-55°C ~ 155°C", Package / Case="0805 (2012 Metric)", Power (Watts)="0.125W, 1/8W", Supplier Device Package=0805, Supplier Part Number 1=541-1.21KCCT-ND, Temperature Coefficient=±100ppm/°C, Tolerance=±1%, Category=Resistors, ComponentLink1Description=http://www.vishay.com/docs/20035/dcrcwe3.pdf, ComponentLink1URL=http://www.vishay.com/docs/20035/dcrcwe3.pdf, Composition="Thick Film", Failure Rate=-, Features="Automotive AEC-Q200", Height - Seated (Max)="0.020\" (0.50mm)", Packaging="Cut Tape (CT)", Part Status=Active, Pricing 1="1=0.1, 10=0.055, 100=0.0223, 1000=0.01003, 2500=0.0087 (USD)", RoHS="RoHS Compliant", Size / Dimension="0.079\" L x 0.049\" W (2.00mm x 1.25mm)", Stock 1=93438, Supplier 1=Digi-Key
R30 R32 R42 R44: library part CMP-1013-00393-1, "RES SMD 249K OHM 1% 1/8W 0805", Manufacturer="Vishay Dale", Manufacturer Part Number=CRCW0805249KFKECC, Operating Temperature="-55°C ~ 155°C", Package / Case="0805 (2012 Metric)", Power (Watts)="0.125W, 1/8W", Supplier Device Package=0805, Supplier Part Number 1=541-4128-1-ND, Temperature Coefficient=±100ppm/°C, Tolerance=±1%, Category=Resistors, ComponentLink1Description=http://www.vishay.com/docs/28773/crcwce3.pdf, ComponentLink1URL=http://www.vishay.com/docs/28773/crcwce3.pdf, Composition="Thick Film", Failure Rate=-, Features=-, Height - Seated (Max)="0.024\" (0.60mm)", Packaging="Cut Tape (CT)", Part Status=Active, Pricing 1="1=0.1, 10=0.06, 100=0.0244, 1000=0.01094, 2500=0.0095, 5000=0.00785 (USD)", RoHS="RoHS Compliant", Size / Dimension="0.079\" L x 0.049\" W (2.00mm x 1.25mm)", Stock 1=19464, Supplier 1=Digi-Key
R59 R60: library part CMP-1013-00393-1, "RES SMD 50K OHM 1% 1/8W 0805", Supplier Device Package=0805, Supplier Part Number 1=541-4128-1-ND, Temperature Coefficient=±100ppm/°C, Tolerance=±1%
TP1 TP2 TP3 TP4 TP5 TP6 TP7 TP8: library part CMP-1672-00009-1, "Test Point, Orange, 1-Pin THD, RoHS", Colour=Orange,White, Flammability Rating="UL94 V-0", Forward Current="3 A", Forward Voltage="1.08 V", Manufacturer="Keystone Electronics", Manufacturer Part Number=5003, Max Operating Temperature="150 degC", Max Surge Current="80 A", Min Operating Temperature="-65 degC", Package Quantity=500, Peak Reverse Current="600 uA", Supplier Part Number 1=1432640, Body Material=PBT, ComponentLink1Description="Manufacturer URL", ComponentLink1URL=http://www.keyelco.com/, ComponentLink2Description=Datasheet, ComponentLink2URL=http://keyelco.com/userAssets/file/M65p56.pdf, Contact Material=Bronze, Contact Plating=Silver,Tin, DatasheetVersion=Jun-15, Diameter="5.3 mm", Height="0.25 inch", Inside Diameter=1.27mm, Lead Free="Lead Free", Length="9.5 mm", Material=Bronze,Nylon,Silver, Mount="Through Hole", Number of Pins=1, Outside Diameter=2.54mm, PackageDescription="1-Pin Through Hole Device, Dia 2.54 mm", PackageReference=5003, Packaging=Bulk, Pins=2, Plating=Silver, Pricing 1="100=0.176, 500=0.148, 1000=0.146, 2000=0.143, 4000=0.141 (USD)", Radiation Hardening=No, REACH SVHC="No SVHC", RoHSCompliant=true, Stock 1=5752, Supplier 1="Future Electronics", Termination="Through Hole", Weight="0.01 lb", Width="0.25 inch"
U1: "IC VREF SERIES 4.096V SOT23", Current - Supply=350µA, Manufacturer="Maxim Integrated", Operating Temperature="-40°C ~ 125°C (TA)", Package / Case=SOT-23-6, Supplier Part Number 1=MAX6070AAUT41+TCT-ND, Temperature Coefficient=6ppm/°C, Tolerance=±0.04%, Voltage - Input="4.3 V ~ 5.5 V", Voltage - Output (Min/Fixed)=4.096V, Category="Integrated Circuits (ICs)", ComponentLink1Description=https://datasheets.maximintegrated.com/en/ds/MAX6070-MAX6071.pdf, ComponentLink1URL=https://datasheets.maximintegrated.com/en/ds/MAX6070-MAX6071.pdf, Manufacturer Part Number=MAX6070AAUT41+T, Mounting Type="Surface Mount", Noise - 0.1Hz to 10Hz=9.6µVp-p, Noise - 10Hz to 10kHz=9µVrms, Output Type=Fixed, Packaging="Cut Tape (CT)", Part Status=Active, Pricing 1="1=3.41, 10=3.213, 25=2.5704, 50=2.4418, 100=2.2491, 250=2.13344, 500=2.05634 (USD)", Reference Type=Series, RoHS="RoHS Compliant", Stock 1=2623, Supplier 1=Digi-Key, Supplier Device Package=SOT-23-6
U2: library part CMP-0793-00166-1, "4.5 Ohm Ron, 16-Channel, +/-5 V,+12 V,+5 V and +3.3 V Multiplexer, 28-pin SOP (RU-28), Reel", Manufacturer="Analog Devices", Bandwidth (Hz)="21M, 22M, 19M, 17M", Code_JEDEC=MO-153-AE, ComponentLink1Description="Manufacturer URL", ComponentLink1URL=http://www.analog.com/en/index.html, ComponentLink2Description=Datasheet, ComponentLink2URL=http://www.analog.com/static/imported-files/data_sheets/ADG1606_1607.pdf, ComponentLink3Description="Package Specification", ComponentLink3URL=http://www.analog.com/static/imported-files/packages/249854663RU_28.pdf, DatasheetVersion="Rev. 0", Max Analog Signal Range="Vss to Vdd", Mounting Technology="Surface Mount", PackageDescription="28-Pin Thin Shrink Small Outline Package, Body 9.7 x 4.4 mm, Pitch 0.65 mm", PackageReference=RU-28, PackageVersion=Mar-05, Packing=Reel, PartNumber=ADG1606BRUZ-REEL7, Ron (ohms)=4, t transition (s)=143n
U3: library part CMP-0249-00017-1, "16-Bit, +5V, 200ksps ADC with 10uA Shutdown, 10-Pin uMAX, -40°C to +85°C, Pb-Free, Tape and Reel", Code_JEDEC=MO-187-BA, ComponentLink1Description="Manufacturer URL", ComponentLink1URL=http://www.maxim-ic.com, ComponentLink2Description=Datasheet, ComponentLink2URL=http://datasheets.maxim-ic.com/en/ds/MAX11100.pdf, ComponentLink3Description="Package Specification", ComponentLink3URL=http://pdfserv.maxim-ic.com/package_dwgs/21-0061.PDF, DatasheetVersion="Rev 1, Jan-2012", PackageDescription="10-Pin Micro-MAX Thin Shrink Small Outline (uSOP), 3 x 3 x 0.85 mm Body, 0.5 mm Pitch, Pb-Free", PackageReference=U10+2, PackageVersion="revL, 2008"
U4: library part CMP-0055-00867-3, "Low Power CMOS Dual Operational Amplifier, 8-pin Narrow SOIC", Manufacturer="Texas Instruments", Package Reference=D0008A, PackageTopMarking=NSZXTT*LPC66*2AIM, PowerWise=N, Code_IPC=SOIC127P600-8, Code_JEDEC=MS-012-AA, ComponentLink1Description="Datasheet URL", ComponentLink1URL=http://www.ti.com/general/docs/lit/getliterature.tsp?genericPartNumber=LPC662&fileType=pdf, CompType=Amplifiers, PackageDescription="SOIC Narrow, 4.9 x 3.9 x 1.45mm, 8 Lead, 1.27mm Pitch", PartId=1, PinCount=8, RoHS=N
U5 U7: "Single Axix CMOS Signal Conditioning Module", Manufacturer=Spectron, Manufacturer Part Number=A40012
U6: library part CMP-0055-00867-3, "Low Power CMOS Dual Operational Amplifier, 8-pin Narrow SOIC", Base Part Number=LPC662, Current - Supply=86µA, Manufacturer="Texas Instruments", Manufacturer Part Number=LPC662AIMX/NOPB, Operating Temperature="-40°C ~ 85°C", Package / Case="8-SOIC (0.154\", 3.90mm Width)", Supplier Device Package=8-SOIC, Supplier Part Number 1=296-35456-1-ND, Voltage - Supply, Single/Dual (±)="4.75 V ~ 15.5 V, ±2.38 V ~ 7.75 V", Amplifier Type="General Purpose", Category="Integrated Circuits (ICs)", ComponentLink1Description=http://www.ti.com/lit/ds/symlink/lpc662.pdf, ComponentLink1URL=http://www.ti.com/lit/ds/symlink/lpc662.pdf, Mounting Type="Surface Mount", Output Type=Rail-to-Rail, Packaging="Cut Tape (CT)", Part Status=Active, Pricing 1="1=2.98, 10=2.672, 100=2.1893, 500=1.86368, 1000=1.57178 (USD)", RoHS="RoHS Compliant", Slew Rate="0.11 V/µs", Stock 1=4976, Supplier 1=Digi-Key

## Free pads (board coordinates)
  round 1.524 hole 0.762: 2(51.714,89.992)

## Via types
v1: diameter 1.27, hole 0.711, Top Layer to Bottom Layer, 20 vias
v2: diameter 0.75, hole 0.5, Top Layer to Bottom Layer, 3 vias

## Nets (pads, with @x,y where several pads share a name; then routed paths per layer and width w, separated by ;. In a path a pad name is that pad's centre, name@x,y a point inside that pad or via, vN(x,y) a via of type N, cw(c..) or ccw(c..) an arc to the next point about the centre after c; other vN are vias at no path point)
+3.3: C5.1 P14.20 U3.3 | length 46.8
  Top Layer w0.254: U3.3 v2(31.778,135.07)
  Bottom Layer w0.254: C5.1@31.745,134.137 C5.1@31.762,134.154 ; v2(31.778,135.07) 31.778,134.17 C5.1@31.762,134.154 ; P14.20 42.302,173.366 41.021,172.085 41.021,142.466 32.709,134.154 C5.1@31.762,134.154
+5: C3.1 C4.1 C7.1 C12.1 P14.19 pad.2 R3.2 R6.2 R11.2 R13.2 R14.2 R15.2 R20.2 U1.3 U1.4 U2.1 U2.18 U3.7 U4.8 U5.7 U6.8 U7.7 | length 49.7
  Top Layer w0.254: U6.8 C12.1 ; v1(26.619,149.428) 27.328,149.428 27.841,148.916 U2.18 ; U1.3 U1.4 34.337,128.941 C3.1 33.412,125.106 v1(33.401,125.095) ; U3.7 34.189,134.572 v1(36.171,134.572) ; v1(36.353,140.225) 36.353,142.371 36.398,142.416 U2.1 ; U4.8 C7.1
  Bottom Layer w0.254: R14.2 R15.2 v1(12.7,167.96) ; v1(6.274,153.391) 8.037,153.391 R3.2 8.194,153.416 8.219,153.441 R20.2@21.844,153.441 ; R13.2 8.153,138.649 v1(8.153,140.386) ; v1(36.171,134.572) 37.84,134.572 37.872,134.605 C4.1@37.973,134.504
  other v1: 19.837,90.043
+12: DS1.1 DS2.1 DS3.1 DS4.1 DS5.1 P2.2 P4.2 P14.21 P14.22 P18.2 P19.2 P20.2 P22.2 | length 110.7
  Top Layer w0.254: DS5.1 DS5.1@57.652,163.754
  Top Layer w0.5: P14.22@44.78,173.748 44.842,173.686 P14.21 49.385,166.399 62.48,166.399 64.516,164.362 64.516,118.344 P2.2 ; DS2.1@57.475,130.957 61.663,130.957 62.993,129.627 64.654,129.627 ; DS5.1@57.652,163.754 61.262,163.754 63.525,161.491 64.327,162.294 ; DS1.1@57.736,139.127 61.436,139.127 P19.2 64.602,137.492 ; DS4.1@58.089,155.666 58.234,155.522 61.376,155.522 P20.2 64.516,153.305 ; DS3.1 61.696,147.358 P18.2 64.573,145.497
-5: P14.3
"ADC REF": C2.1 U1.5 U1.6 U3.6 | length 4.7
  Top Layer w0.254: U3.6 34.187,132.07 U1.6 34.337,131.028 34.395,130.97 35.862,130.97 C2.1@35.92,130.912
Analog_Mux_Out: U2.28 U3.5 | length 11.4
  Top Layer w0.254: U3.5 28.894,134.07 28.054,134.91 28.054,140.617 29.853,142.416 U2.28
"Arrestment Heater FET": P14.16 R9.1 | length 26.4
  Top Layer w0.254: P14.16 38.585,172.119 38.585,169.921 50.668,157.838 52.866,157.838 54.627,156.077 R9.1
"Arrestment Htr Out": P20.1 Q3.4 R8.1 | length 6.4
  Top Layer w0.254: R8.1@57.655,150.966 59.506,150.966 62.504,150.966 63.548,152.01 P20.1@63.593,152.01
  other v1: 59.944,150.966
"Arrestment Htr_LED": DS4.2 R8.2 | length 1.1
  Top Layer w0.254: R8.2@58.089,152.773 DS4.2@58.089,153.922
"Arrestment Thermistor": C16.1 R51.2 U2.20 | length 18.6
  Top Layer w0.254: R51.2 19.254,153.482 C16.1 19.304,148.794 20.482,147.616 U2.20
"Aux Heater FET": P14.17 R17.1 | length 17.1
  Top Layer w0.254: P14.17 47.04,163.664 R17.1
"Aux Htr Out": P4.1 Q5.4 R12.1 | length 6.6
  Top Layer w0.254: R12.1 58.832,158.916 v1(59.428,159.512) 60.426,159.512 61.188,160.274 P4.1
"Aux Htr_LED": DS5.2 R12.2 | length 1.4
  Top Layer w0.254: R12.2 DS5.2
"Aux Thermistor": C19.1 R16.2 U2.25 | length 26.1
  Top Layer w0.254: R16.2 10.364,138.618 C19.1 10.414,140.556 14.224,144.366 U2.25
"Board2 Heater FET": P14.18
"Board2 Thermistor": U2.26 | length 0.1
  Top Layer w0.254: U2.26 U2.26@30.703,143.716
"Conning Tower Heater FET": P14.14 R4.1 | length 44
  Top Layer w0.254: P14.14 36.045,172.119 36.045,154.963 52.366,138.642 R4.1
"Conning Tower Htr Out": P19.1 Q1.4 R1.1 | length 6.1
  Top Layer w0.254: R1.1 59.643,134.366 v1(60.03,134.753) 61.519,136.242 P19.1
"Conning Tower Htr_LED": DS1.2 R1.2 | length 1.4
  Top Layer w0.254: R1.2@57.736,135.997 DS1.2
"Conning Tower Thermistor": C14.1 R49.2 U2.22 | length 28.9
  Top Layer w0.254: R49.2 10.11,153.482 C14.1 10.16,147.828 11.672,146.316 U2.22 U2.22@30.703,146.316
"CROSS NEUTRAL": U7.25
Cross_Raw: R45.1 TP5.1 U7.19 | length 37.4
  Top Layer w0.254: U7.19 9.144,92.71 10.16,91.694 ; TP5.1 10.16,91.694 ; R45.1 13.374,81.622 10.16,84.836 10.16,91.694
"Gearbox Heater FET": P14.15 R10.1 | length 33.5
  Top Layer w0.254: P14.15 37.222,160.136 49.95,147.408 R10.1
"Gearbox Htr Out": P18.1 Q4.4 R7.1 | length 6
  Top Layer w0.254: R7.1@58.223,142.708 62.019,142.708 P18.1
  other v1: 60.001,142.708
"Gearbox Htr_LED": DS3.2 R7.2 | length 1.4
  Top Layer w0.254: R7.2@58.149,144.526 DS3.2@58.149,145.876
"Gearbox Thermistor": C15.1 R50.2 U2.21 | length 23.8
  Top Layer w0.254: R50.2 14.682,153.482 14.732,153.432 14.732,147.994 15.76,146.966 U2.21
GND: C1.1 C2.2 C3.2 C4.2 C5.2 C7.2 C10.2 C12.2 C13.2 C14.2 C15.2 C16.2 C17.2 C18.2 C19.2 C20.2 C21.2 C22.2 C23.2 P1.1 P2.1 P3.1 P3.3 P14.1 P14.2 P14.23 P14.24 P16.1 P17.1 P21.1 P27.1 Q1.3 Q2.3 Q3.3 Q4.3 Q5.3 R33.1 R47.1 U1.2 U2.12 U2.27 U3.2 U3.4 U3.8 U4.4 U5.22 U6.4 U7.22
"Lid Thermistor": C21.1 R56.2 U2.19 | length 13.5
  Top Layer w0.254: R56.2 24.08,153.482 C21.1 24.13,149.2 25.064,148.266 U2.19
"LONG NEUTRAL": U5.25
Long_Raw: R28.1 TP1.1 U5.19 | length 39.2
  Top Layer w0.254: U5.19 40.907,92.71 43.18,90.437 ; TP1.1 43.18,90.437 ; R28.1 44.743,81.622 43.18,83.185 43.18,90.437
"Meter Heater FET": P14.13 R5.1 | length 50.6
  Top Layer w0.254: P14.13 34.682,155.31 47.382,142.61 47.382,133.526 50.021,130.887 R5.1
"Meter Thermistor 1": C17.1 R52.2 U2.24 | length 50.8
  Top Layer w0.254: C17.1@5.538,167.96 R52.2 3.302,147.994 6.28,145.016 U2.24 U2.24@30.703,145.016
"Meter Thermistor 2": C18.1 R53.2 U2.23 | length 49.5
  Top Layer w0.254: C18.1@10.06,167.96 R53.2 7.894,164.612 4.928,161.646 4.928,148.996 8.258,145.666 U2.23 U2.23@30.703,145.666
Meter_Htr_LED: DS2.2 R2.2 | length 1.8
  Top Layer w0.254: R2.2@57.475,127.607 DS2.2@57.475,129.357
METER_HTR_OUT: P22.1 Q2.4 R2.1 | length 6.6
  Top Layer w0.254: R2.1@57.475,125.907 58.916,125.907 61.293,128.284 P22.1
  other v1: 59.458,126.449
"MUX A2": P14.7 U2.15 | length 21.7
  Top Layer w0.254: P14.7 27.062,155.689 30.747,152.004 30.747,150.91 30.702,150.866 U2.15
"MUX A3": P14.11 U2.14 | length 21.9
  Top Layer w0.254: P14.11 32.142,158.127 34.011,156.258 34.011,153.308 U2.14
MUX_A0: P14.8 U2.17 | length 28.1
  Top Layer w0.254: P14.8 28.425,173.482 28.425,156.487 32.258,152.654 32.258,150.241 31.583,149.566 U2.17
MUX_A1: P14.6 U2.16 | length 27.2
  Top Layer w0.254: P14.6 25.885,172.119 25.885,152.677 28.328,150.234 30.685,150.234 U2.16@30.703,150.216
NetC1_2: C1.2 U1.1 | length 2.4
  Top Layer w0.254: C1.2@29.464,131.456 29.972,131.964 31.544,131.964 U1.1
NetC6_1: C6.1 U5.28 | length 2.9
  Top Layer w0.254: U5.28 39.254,69.85 C6.1
NetC6_2: C6.2 U5.27 | length 2.9
  Top Layer w0.254: U5.27 39.254,72.39 C6.2
NetC8_1: C8.1 U5.21 | length 2.9
  Top Layer w0.254: U5.21 39.254,87.63 C8.1
NetC8_2: C8.2 U5.20 | length 2.9
  Top Layer w0.254: U5.20 39.254,90.17 C8.2
NetC9_1: C9.1 U7.21 | length 3.2
  Top Layer w0.254: U7.21 7.758,87.63 C9.1@8.128,88
NetC9_2: C9.2 U7.20 | length 3.2
  Top Layer w0.254: U7.20 5.45,89.8 C9.2@8.128,89.8
NetC11_1: C11.1 U7.28 | length 3.2
  Top Layer w0.254: U7.28 7.758,69.85 C11.1
NetC11_2: C11.2 U7.27 | length 3.2
  Top Layer w0.254: U7.27 7.758,72.39 C11.2
NetC22_1: C22.1 R57.1 TP2.1 U2.10 | length 64.8
  Top Layer w0.254: U2.10 39.046,148.266 42.418,144.893 42.418,128.118 v1(44.094,126.441) ; C22.1 47.417,91.832 R57.1 47.467,109.189 TP2.1
  Signal Layer 1 w0.254: v1(44.094,126.441) 44.094,117.272 47.498,113.868 TP2.1
NetC23_1: C23.1 R58.1 TP6.1 U2.11 | length 83.8
  Top Layer w0.254: C23.1 15.413,91.832 R58.1 15.463,109.17 TP6.1 ; U2.11 39.552,148.916 43.942,144.526 v1(43.942,131.92)
  Signal Layer 1 w0.254: TP6.1 15.413,111.781 19.99,116.357 33.122,116.357 38.735,121.971 38.735,126.713 v1(43.942,131.92)
NetP1_2: P1.2 R13.1 R16.1 | length 4.1
  Top Layer w0.254: R16.1 8.128,135.402 P1.2
  Bottom Layer w0.254: R13.1 8.122,135.408 P1.2
NetP2_4: P2.4 R18.1 | length 4.6
  Top Layer w0.254: R18.1 58.522,120.844 P2.4
NetP3_2: P3.2 R15.1 R53.1 | length 6.7
  Top Layer w0.254: R53.1 P3.2
  Bottom Layer w0.254: R15.1@7.894,169.88 P3.2
NetP3_4: P3.4 R14.1 R52.1 | length 9.7
  Top Layer w0.254: R52.1 3.302,172.212 4.318,173.228 P3.4
  Bottom Layer w0.254: R14.1 3.302,172.212 4.318,173.228 P3.4
NetP16_2: P16.2 R3.1 R49.1 | length 7.4
  Top Layer w0.254: R49.1 8.122,157.962 P16.2
  Bottom Layer w0.254: R3.1 8.128,157.988 8.89,158.75 P16.2
NetP17_2: P17.2 R6.1 R50.1 | length 7.5
  Top Layer w0.254: R50.1 12.7,157.968 P17.2
  Bottom Layer w0.254: R6.1 12.7,157.968 P17.2 P17.2@13.482,158.67
NetP21_2: P21.2 R11.1 R51.1 | length 7.4
  Top Layer w0.254: R51.1 17.272,157.968 P21.2
  Bottom Layer w0.254: R11.1 17.272,157.968 P21.2
NetP27_2: P27.2 R20.1 R56.1 | length 7.4
  Top Layer w0.254: R56.1 21.844,157.226 22.626,158.008 P27.2
  Bottom Layer w0.254: R20.1 21.844,157.206 22.626,157.988 P27.2
NetQ1_1: Q1.1 R4.2 | length 4.2
  Top Layer w0.254: v1(51.14,134.112) 51.35,134.112 R4.2
NetQ2_1: Q2.1 R5.2 | length 4.6
  Top Layer w0.254: v1(51.192,125.857) 54.232,128.897 R5.2
NetQ3_1: Q3.1 R9.2 | length 4.9
  Top Layer w0.254: v1(51.054,150.658) 51.188,150.658 54.402,153.872 R9.2
NetQ4_1: Q4.1 R10.2 | length 4.9
  Top Layer w0.254: v1(51.111,142.494) 51.336,142.719 51.453,142.719 54.442,145.708 R10.2
NetQ5_1: Q5.1 R17.2 | length 4.4
  Top Layer w0.254: v1(51.046,158.75) 53.847,161.551 R17.2
NetR22_1: R22.1 R28.2 U4.6 | length 8.7
  Top Layer w0.254: R28.2 50.126,84.328 51.103,85.305 U4.6 54.991,85.305 R22.1
NetR22_2: R22.2 TP3.1 U4.3 U4.7 | length 30.8
  Top Layer w0.254: U4.3 49.237,85.305 50.507,86.575 U4.7 54.561,86.575 R22.2 55.538,108.878 TP3.1@55.88,109.22
NetR23_1: R23.1 R24.1 U5.2 | length 4.7
  Top Layer w0.254: R24.1 59.436,72.434 ; R23.1 59.436,71.55 59.436,72.434 ; U5.2 59.48,72.39 59.436,72.434
NetR23_2: R23.2 U5.1 | length 2.7
  Top Layer w0.254: R23.2 59.612,69.85 U5.1
NetR24_2: R24.2 U5.3 | length 2.8
  Top Layer w0.254: R24.2 59.524,74.93 U5.3
NetR26_1: R26.1 U5.6 | length 2.9
  Top Layer w0.254: R26.1 59.944,82.55 U5.6
NetR26_2: R26.2 U5.5 | length 2.9
  Top Layer w0.254: R26.2 59.944,80.01 U5.5
NetR29_1: R29.1 R33.2 U4.5 | length 4.8
  Top Layer w0.254: R33.2 U4.5 R29.1
NetR30_1: R30.1 R32.1 U5.11 | length 4.7
  Top Layer w0.254: R30.1 59.436,95.25 ; R32.1 59.436,95.25 ; U5.11 59.436,95.25
NetR30_2: R30.2 U5.10 | length 2.8
  Top Layer w0.254: R30.2 59.524,92.71 U5.10
NetR32_2: R32.2 U5.12 | length 2.8
  Top Layer w0.254: R32.2 59.524,97.79 U5.12
NetR36_1: R36.1 R37.1 U7.2 | length 4.4
  Top Layer w0.254: R36.1 R37.1 ; 27.94,72.39 U7.2
NetR36_2: R36.2 U7.1 | length 2.6
  Top Layer w0.254: R36.2 28.028,69.85 U7.1
NetR37_2: R37.2 U7.3 | length 2.1
  Top Layer w0.254: R37.2@28.36,74.93 U7.3
NetR38_1: R38.1 R45.2 U6.6 | length 9.1
  Top Layer w0.254: R45.2 18.122,84.676 18.663,85.217 U6.6 23.661,85.217 R38.1
NetR38_2: R38.2 TP7.1 U6.3 U6.7 | length 31.5
  Top Layer w0.254: U6.3 17.139,85.217 18.409,86.487 U6.7 23.661,86.487 R38.2 TP7.1
NetR40_1: R40.1 U7.6 | length 2.7
  Top Layer w0.254: R40.1 28.36,82.55 U7.6
NetR40_2: R40.2 U7.5 | length 2.7
  Top Layer w0.254: R40.2 28.36,80.01 U7.5
NetR42_1: R42.1 R44.1 U7.11 | length 4.5
  Top Layer w0.254: R42.1@28.033,94.207 R44.1@28.033,96.405 ; 28.214,95.25 U7.11
NetR42_2: R42.2 U7.10 | length 1.8
  Top Layer w0.254: R42.2@28.634,92.71 U7.10
NetR44_2: R44.2 U7.12 | length 1.8
  Top Layer w0.254: R44.2@28.644,97.79 U7.12
NetR46_1: R46.1 R47.2 U6.5 | length 5.2
  Top Layer w0.254: R47.2 U6.5 22.391,83.947 R46.1
NetR57_2: R57.2 U4.1 U4.2 | length 3.4
  Top Layer w0.254: U4.2 U4.1 R57.2
NetR58_2: R58.2 U6.1 U6.2 | length 3.5
  Top Layer w0.254: U6.2 U6.1 R58.2
NetR59_1: R59.1 U5.17 | length 2.7
  Top Layer w0.254: U5.17 38.95,97.79 R59.1
NetR59_2: R59.2 U5.18 | length 2.7
  Top Layer w0.254: U5.18 38.95,95.25 R59.2
NetR60_1: R60.1 U7.17 | length 2.7
  Top Layer w0.254: U7.17 7.2,97.79 R60.1
NetR60_2: R60.2 U7.18 | length 2.7
  Top Layer w0.254: U7.18 7.2,95.25 R60.2
NetU5_24: U5.24
NetU7_24: U7.24
Pressure_Sensor: C20.1 R18.2 U2.9 | length 46.7
  Top Layer w0.254: U2.9 38.608,147.616 41.656,144.568 41.656,124.663 45.415,120.904 R18.2 56.562,117.152 C20.1
SPI0_MISO: P14.9 U3.1 | length 35.5
  Top Layer w0.254: v2(29.566,137.852) 29.566,136.072 29.568,136.07 U3.1
  Signal Layer 1 w0.254: v2(29.566,137.852) 29.602,137.888 P14.9
SPI0_SCLK: P14.10 U3.10 | length 39.3
  Top Layer w0.254: U3.10@34.277,136.072 v2(34.277,137.323)
  Signal Layer 1 w0.254: P14.10 30.965,172.119 30.965,159.027 34.277,155.715 v2(34.277,137.323)
Thermistor_CS0: P14.12 U3.9 | length 40.7
  Top Layer w0.254: P14.12 30.886,172.226 30.886,157.472 33.122,155.237 33.122,138.481 32.639,137.998 32.639,136.22 33.289,135.57 U3.9
VR_REF_Cross: C13.1 R46.2 TP8.1 U7.9 | length 34.2
  Top Layer w0.254: R46.2 27.94,85.51 27.94,89.662 28.078,89.8 28.078,90.17 U7.9 33.274,90.17 33.528,90.424 33.528,106.172 TP8.1
VR_REF_Long: C10.1 R29.2 TP4.1 U5.9 | length 33.1
  Top Layer w0.254: R29.2 59.32,86.117 C10.1 59.574,90.17 U5.9 65.024,90.17 65.532,90.678 65.532,105.664 62.484,108.712 TP4.1
pads on no net: P2.3 P14.4 P14.5 U2.2 U2.3 U2.4 U2.5 U2.6 U2.7 U2.8 U2.13 U5.4 U5.8 U5.13 U5.14 U5.15 U5.16 U5.23 U5.26 U7.4 U7.8 U7.13 U7.14 U7.15 U7.16 U7.23 U7.26
copper on no net: | length 0.9
  Signal Layer 1 w0.254: 14.475,121.532 14.834,121.532 ; 14.58,121.234 14.834,121.488 14.834,121.532 ; 14.948,121.647 14.834,121.532

## Polygon pours and split planes (outlines as drawn)
GND on Signal Layer 1 "GND_L03_P003" (solid, pour order 3): -1.308,180 66.8,180 66.8,58.166 -1.308,58.166
GND on Top Layer "GND_L01_P001" (solid, pour order 1): -1.153,180 66.958,180 66.822,58.166 -1.153,58.166
GND on Bottom Layer "GND_L04_P000" (solid, pour order 0): -1.153,58.166 66.955,58.166 66.955,180 -1.153,180